# EAGLE board Bee Carrier v1.0 (EAGLE 6.2)
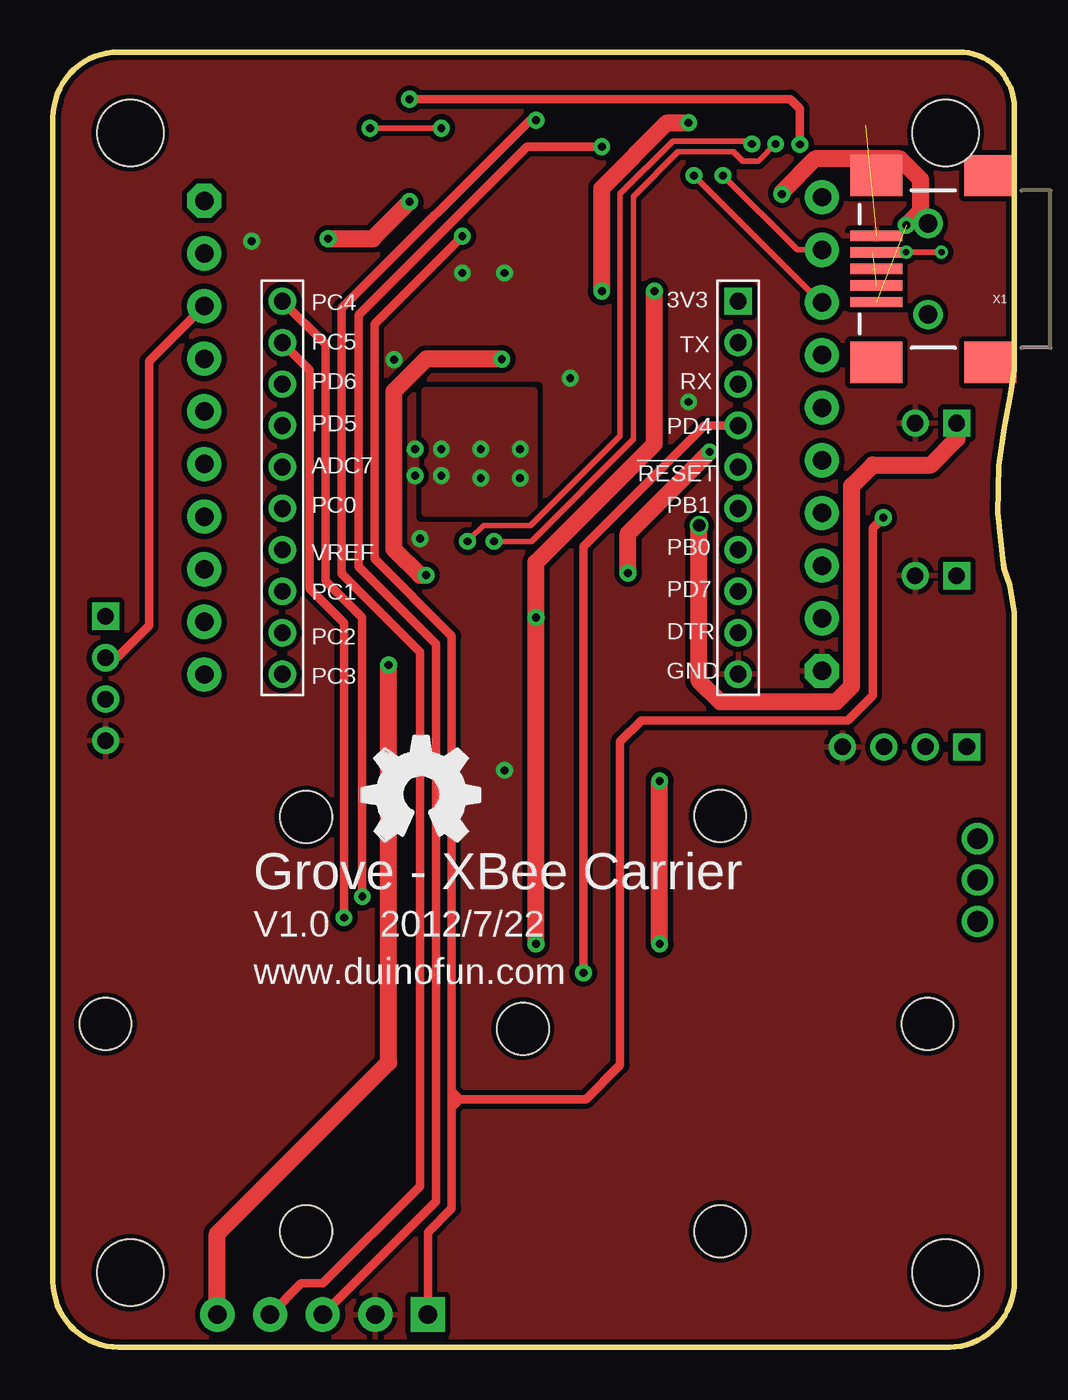
[diagram p0: board, top side]
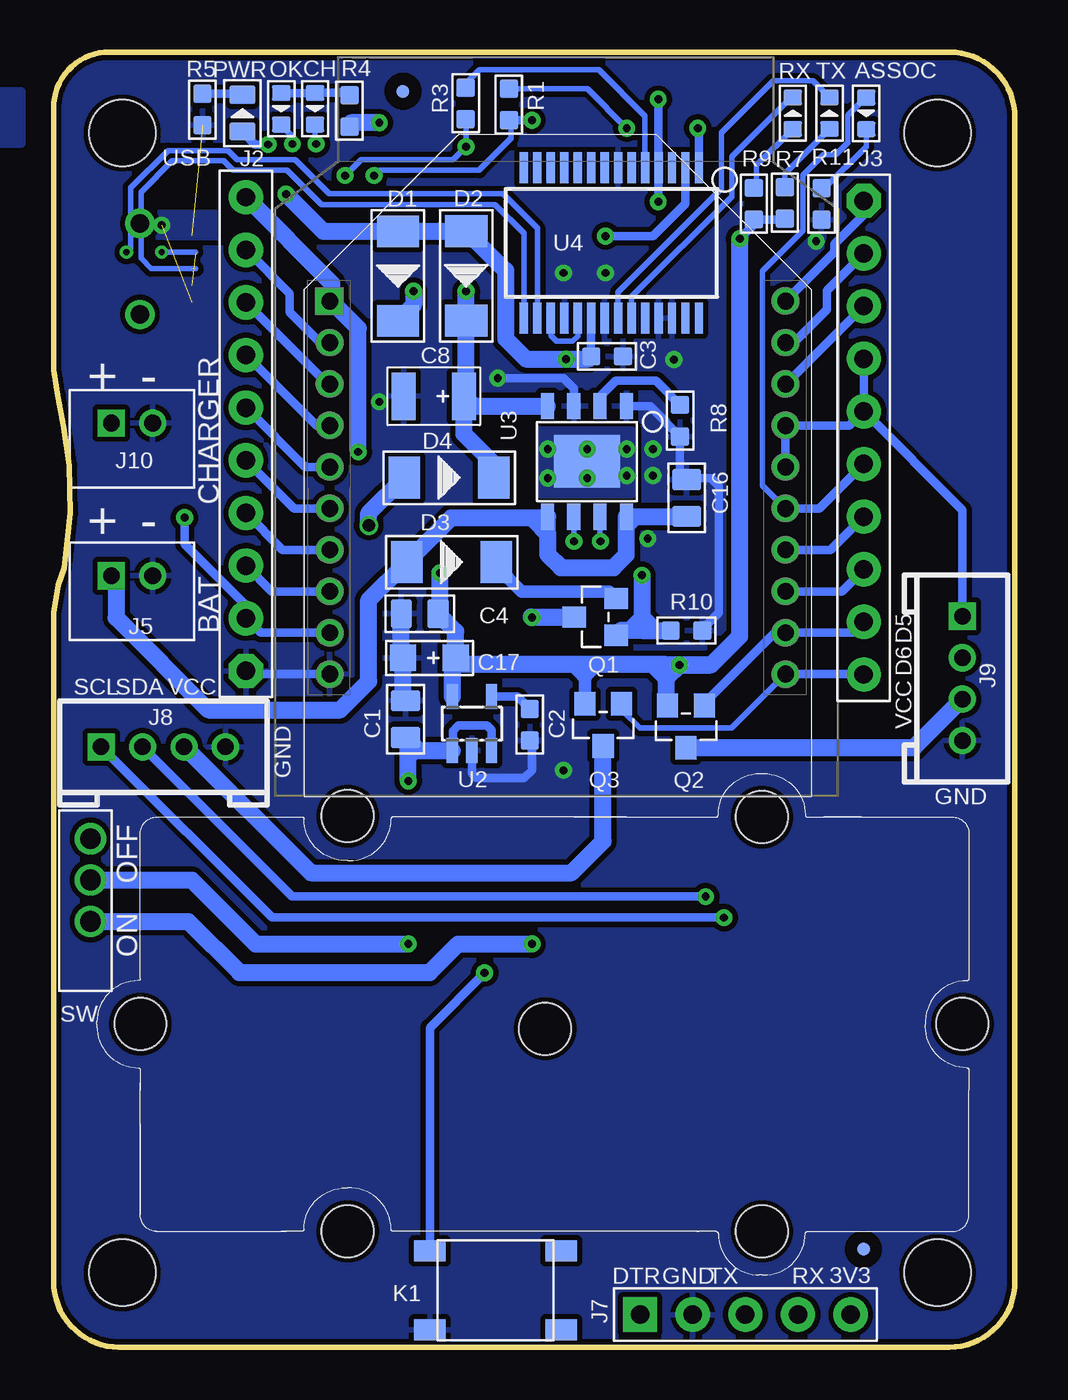
[diagram p1: board, bottom side, seen from below]

Size 46.48 x 62.53 mm. Coordinates in mm from the lower left corner, seen from the top.
Outline: 0,59.46 arc-67 2.69,62.53
Outline: 46.48,3.07 arc-67 43.79,0
Outline: 3.1,0 arc-67 0.03,2.69
Outline: 46.46,47.17 46.38,46.94
Outline: 46,38.05 46.46,35.46 46.46,3.2 arc-90 43.28,0.03 3.23,0.03 arc-90 0.06,3.2 0.06,59.35 arc-90 3.23,62.53 43.75,62.53 arc-90 46.46,59.82 46.46,47.17
Outline: 46.46,35.48 46.23,36.8 45.95,37.62 45.64,40.28 45.7,42.57 45.97,44.4 46.25,45.95 46.46,47.17
Copper layers (1*16): Top 0.035mm / dielectric 1.5mm / Bottom 0.035mm
Design rules: minimum track width 6mil, minimum drill 12mil, track to track 6mil, track to pad 6mil, pad to pad 6mil, via to via 6mil, smd to smd 0mil, copper to edge 10mil, drill to drill 10mil, minimum pad ring 10mil, minimum via ring 6mil, stop-mask expansion 2mil, vias tented up to drill 0mil, thermal gap 10mil
Net classes: 0 default: width 0.203 mm, drill 0.305 mm, clearance 0.127 mm
Holes 3.2 mm at 3.79,58.62 3.79,3.62 43.14,3.62 43.14,58.62
Holes 2.5 mm at 2.59,15.62 32.26,25.65 12.27,25.6 22.73,15.39 32.26,5.61 42.27,15.62 12.27,5.61

## Footprints (pad centres in the part's own frame; a part is rotated, then mirrored left to right if it is on the bottom)
D0603 = smd 0.762 x 0.889: + -0.762,0; - 0.762,0
0805 = smd 1.016 x 1.397: 1 -0.889,0; 2 0.889,0
0603 = smd 0.889 x 0.889: 1 -0.762,0; 2 0.762,0
AVX-B = smd 1.143 x 2.286: + -1.46,0; - 1.46,0
AVX-A = smd 1.27 x 1.27: + -1.27,0; - 1.27,0
D2010 = smd 1.524 x 2.032: + -2.159,0; - 2.159,0
2.54_10P = drill 0.889 pad 1.651 octagon: 1 0,11.43 | drill 0.889 pad 1.651: 2 0,8.89; 3 0,6.35; 4 0,3.81; 5 0,1.27; 6 0,-1.27; 7 0,-3.81; 8 0,-6.35; 9 0,-8.89; 10 0,-11.43
2P-2.0-LEADED-4.7X6.0 = drill 0.8 pad 1.3 square: 1 -1,0.75 | drill 0.8 pad 1.3: 2 1,0.75
CK_1X5 = drill 0.889 pad 1.651 square: 1 0,5.08 | drill 0.889 pad 1.651: 2 0,2.54; 3 0,0; 4 0,-2.54; 5 0,-5.08
2.0_1X4 = drill 0.8 pad 1.27 square: 1 -3,0 | drill 0.8 pad 1.27: 2 -1,0; 3 1,0; 4 3,0
BTN-S = smd 1.524 x 1.016: 0A -3.175,1.905; 0B 3.175,1.905; 1A -3.175,-1.905; 1B 3.175,-1.905
MARK = smd 0.635 x 0.635: P$1 0,0
D0805 = smd 0.889 x 1.27: + -0.889,0; - 0.889,0
SOT23 = smd 1.016 x 1.143: 1 -0.889,-1.016; 2 0.889,-1.016; 3 0,1.016
008-SW-3P-DIP = drill 1 pad 1.5: P$1 -3,0.24; P$2 -1,0.24; P$3 1,0.24
CCBEE-PRO = drill 0.813 square: 1 -11,9 | drill 0.813: 2 -11,7; 3 -11,5; 4 -11,3; 5 -11,1; 6 -11,-1; 7 -11,-3; 8 -11,-5; 9 -11,-7; 10 -11,-9; 11 11,-9; 12 11,-7; 13 11,-5; 14 11,-3; 15 11,-1; 16 11,1; 17 11,3; 18 11,5; 19 11,7; 20 11,9
SOT23-5 = smd 0.55 x 1.2: 1 -0.95,-1.3; 2 0,-1.3; 3 0.95,-1.3; 4 0.95,1.3; 5 -0.95,1.3
SOP8 = smd 0.635 x 1.27: 1 -1.905,-2.667; 2 -0.635,-2.667; 3 0.635,-2.667; 4 1.905,-2.667; 5 1.905,2.667; 6 0.635,2.667; 7 -0.635,2.667; 8 -1.905,2.667 | smd 3.175 x 2.54: HEAT 0,0
SSOP28 = smd 0.4 x 1.5: 1 -4.225,-3.625; 2 -3.575,-3.625; 3 -2.925,-3.625; 4 -2.275,-3.625; 5 -1.625,-3.625; 6 -0.975,-3.625; 7 -0.325,-3.625; 8 0.325,-3.625; 9 0.975,-3.625; 10 1.625,-3.625; 11 2.275,-3.625; 12 2.925,-3.625; 13 3.575,-3.625; 14 4.225,-3.625; 15 4.225,3.625; 16 3.575,3.625; 17 2.925,3.625; 18 2.275,3.625; 19 1.625,3.625; 20 0.975,3.625; 21 0.325,3.625; 22 -0.325,3.625; 23 -0.975,3.625; 24 -1.625,3.625; 25 -2.275,3.625; 26 -2.925,3.625; 27 -3.575,3.625; 28 -4.225,3.625
USB-MINIB-NOSTOP = smd 2.5 x 0.5: D+ 2.5,0; D- 2.5,0.8; GND 2.5,-1.6; ID 2.5,-0.8; VBUS 2.5,1.6 | smd 2.5 x 2: G1 -3,-4.5; G2 -3,4.5; G3 2.5,4.5; G4 2.5,-4.5 | drill 0.9 pad 0.8: H1 0,2.2 | drill 0.9 pad 0.787: H2 0,-2.2

## Placement (x,y rotation side)
ASSOC  Green  [D0603]  7.24,59.56 270 bottom
C1  10uF  [0805]  29.47,30.33 90 bottom
C2  100nF  [0603]  23.47,30.07 270 bottom
C3  100nF  [0603]  19.74,47.84 180 bottom
C4  10uF  [0805]  28.79,35.42 180 bottom
C8  10V-22uF  [AVX-B]  28.11,45.91 180 bottom
C16  1uF  [0805]  15.9,41 90 bottom
C17  15v-10uF  [AVX-A]  28.32,33.29 180 bottom
CH  RED  [D0603]  33.84,59.79 270 bottom
D1  SS14  [D2010]  29.83,51.72 270 bottom
D2  SS14  [D2010]  26.54,51.72 270 bottom
D3  SS14  [D2010]  27.24,37.91 0 bottom
D4  SS14  [D2010]  27.37,41.98 0 bottom
J2  HEADER-10P_STANDARD  [2.54_10P]  37.17,44.09 180 bottom
J3  HEADER-10P_STANDARD  [2.54_10P]  7.36,43.91 0 bottom
J5  [2P-2.0-LEADED-4.7X6.0]  42.67,36.5 0 bottom
J7  HEADER_1X5_DD  [CK_1X5]  13.07,1.6 90 bottom
J8  TWIG-2.0-DIP  [2.0_1X4]  41.16,29 0 bottom
J9  TWIG-2.0-DIP  [2.0_1X4]  2.6,32.29 270 bottom
J10  [2P-2.0-LEADED-4.7X6.0]  42.67,43.87 0 bottom
K1  BOTTON-4P-DD  [BTN-S]  25.12,2.77 0 bottom
LOGO2  OSHW_LOGO_FILLX0200-NT  [OSHW_FILLX200_NOTEXT]  14.99,24.43 0 top
MARK1  PAD-MARK  [MARK]  7.37,4.75 0 bottom
MARK2  PAD-MARK  [MARK]  29.59,60.63 0 bottom
OK  Green  [D0603]  35.47,59.78 270 bottom
PWR  red  [D0805]  37.34,59.58 90 bottom
Q1  Si2305DS  [SOT23]  20.32,35.27 90 bottom
Q2  Si2305DS  [SOT23]  15.93,29.97 180 bottom
Q3  Si2305DS  [SOT23]  19.93,30.05 180 bottom
R1  1K  [0603]  24.48,59.99 270 bottom
R3  1K  [0603]  26.57,60.05 270 bottom
R4  1k  [0603]  32.18,59.68 270 bottom
R5  1K  [0603]  39.27,59.75 90 bottom
R7  1K  [0603]  11.16,55.24 270 bottom
R8  3.9K  [0603]  16.22,44.73 90 bottom
R9  1K  [0603]  12.66,55.21 270 bottom
R10  10K  [0603]  15.91,34.61 180 bottom
R11  1K  [0603]  9.39,55.19 90 bottom
RX  red  [D0603]  10.78,59.57 90 bottom
SW  [008-SW-3P-DIP]  44.92,21.57 270 bottom
TWIG1  U2N  [U2N_SILK]  22.1,15.39 0 bottom
TX  red  [D0603]  9.01,59.57 90 bottom
U1  OPEN_BEE_DIP  [CCBEE-PRO]  22.13,41.5 0 bottom
U2  RT9167A_33PB  [SOT23-5]  26.27,30.12 0 bottom
U3  CN3083  [SOP8]  20.71,42.77 180 bottom
U4  FT232RL  [SSOP28]  19.53,53.31 180 bottom
U$1  WIFI_SILK  [WIFI_SILK]  22,41.17 0 bottom
X1  USB-SMD-NS  [USB-MINIB-NOSTOP]  42.29,52.06 180 top

## Library data of the parts
ASSOC C1-C4 C8 C16 C17 CH D1-D4 K1 MARK1 MARK2 OK PWR Q1-Q3 R1 R3-R5 R7-R11 RX SW TX = Discrete
J2 J3 J5 J8-J10 = Connector
J7 = CONNECTER
LOGO2 = logo
TWIG1 = twig_template1
U1 = EXT_moudle
U2-U4 = IC
U$1 = seeedleo
X1 = SparkFun-Connectors

## Nets
A1: J3.8 U1.13
AREF: J3.7 U1.14
ASSOC: ASSOC.+ J3.6 U1.15
D4: J2.7 K1.0A U1.4
D5: J3.4 J3.5 J9.1 U1.16 U1.17
D6: J3.3 J9.2 U1.18
D7: J2.3 U1.8
D8: J2.4 U1.7
D9: J2.5 U1.6
D+: U4.15 X1.D+
D-: U4.16 X1.D-
DTR: J2.2 J7.1 U1.9 U4.2
GND: C1.2 C2.2 C3.1 C4.2 C8.- C16.2 C17.- J2.1 J5.2 J7.2 J8.4 J9.4 J10.2 K1.1A R5.1 R8.1 R10.1 R11.1 U1.10 U2.2 U3.1 U3.3 U4.7 U4.18 U4.21 U4.25 U4.26 X1.GND
HEAT: U3.HEAT
N$1: PWR.- R5.2
N$2: R8.2 U3.2
N$3: D4.+ J10.1
N$6: C2.1 U2.4
N$7: CH.- U3.7
N$8: OK.- U3.6
N$9: CH.+ OK.+ R4.1
N$10: U4.17 U4.19
N$11: D3.- Q1.2
N$12: ASSOC.- R11.2
N$13: D1.- Q1.3 SW.P$3
N$15: R9.1 RX.+
N$16: R7.1 TX.+
PWR_CTR1: J3.10 Q3.1 U1.11
PWR_CTR2: J3.9 Q2.1 U1.12
RESET: J2.6 U1.5
RX: J2.8 J7.4 R1.2 U1.3
RX_LED: RX.- U4.23
RXD: R3.1 U4.5
SCL: J3.2 J8.1 U1.19
SDA: J3.1 J8.2 U1.20
TX: J2.9 J7.3 R3.2 U1.2
TX_LED: TX.- U4.22
TXD: R1.1 U4.1
USB_5V: C3.2 D1.+ D2.+ Q1.1 R10.2 U4.20 X1.VBUS
VBET: C16.1 D3.+ J5.1 U3.5 U3.8
VBET_OUT: C1.1 SW.P$2 U2.1 U2.3
VCC_3V3: C4.1 C17.+ J2.10 J7.5 PWR.+ Q2.2 Q3.2 R7.2 R9.2 U1.1 U2.5 U4.4
VCC_OUT1: J8.3 Q3.3
VCC_OUT2: J9.3 Q2.3
VIN: C8.+ D2.- D4.- R4.2 U3.4

## Tracks (layer width: path | path; a pad name or v marks a point on that pad's centre or on a via)
A1
  Bottom 0.406: U1.13 8.42,36.5 J3.8
AREF
  Bottom 0.406: U1.14 8.96,38.5 J3.7
ASSOC
  Bottom 0.254: ASSOC.+ 7.29,60.32 8.13,59.49 8.13,58.15 8.7,57.58 9.29,57.58 10.29,56.59 10.29,53.9 12.24,51.95 12.24,41.61 U1.15
  Bottom 0.406: U1.15 9.5,40.5 J3.6
D4  (via drill 0.38 pad 0.81)
  Top 0.406: v25.65,18.08 25.65,38.66 31.5,44.5 U1.4
  Bottom 0.406: U1.4 33.77,44.5 J2.7 | K1.0A 28.3,15.44 v25.65,18.08
D5
  Bottom 0.406: J9.1 2.6,40.42 J3.5 | U1.16 U1.17 8.04,44.5 J3.5 | J3.5 J3.4
D6
  Top 0.406: J9.2 3.15,33.29 4.7,34.85 4.7,47.61 J3.3
  Bottom 0.406: U1.18 J3.3
D7
  Bottom 0.406: U1.8 35.93,36.5 J2.3
D8
  Bottom 0.406: U1.7 35.39,38.5 J2.4
D9
  Bottom 0.406: U1.6 34.85,40.5 J2.5
D+  (1 unrouted)
  Bottom 0.254: U4.15 23.76,53.78 25.15,55.17 33.53,55.17 35.18,56.82 37.79,56.82 38.24,57.27 40.74,57.27 42.24,55.77 42.24,52.57 41.74,52.07 39.59,52.07
D-  (via drill 0.3 pad 0.64)  (1 unrouted)
  Top 0.254: v42.94,52.87 v41.24,52.87
  Bottom 0.254: U4.16 23.11,54.02 24.76,55.68 33.15,55.68 34.8,57.33 37.59,57.33 38.04,57.77 40.94,57.77 42.74,55.97 42.74,53.07 v42.94,52.87 | v41.24,52.87 39.6,52.87
DTR  (via drill 0.38 pad 0.81)
  Top 0.406: 19.3,11.61 19.3,11.99 | 19.3,11.99 19.3,12.37 | 19.3,12.37 19.3,34.34 15.57,38.07 15.57,49.4 v19.81,53.64 | 19.3,11.99 19.68,11.99 | 19.68,11.99 25.78,11.99 27.43,13.64 27.43,29.26 28.45,30.28 38.43,30.28 39.62,31.47 39.62,39.55 v40.13,40.06 | 19.68,11.99 19.3,12.37 | 19.3,11.61 19.68,11.99 | 19.3,11.61 19.3,6.73 18.15,5.58 J7.1
  Bottom 0.406: U1.9 36.47,34.5 J2.2 37.17,35.82 40.13,38.79 v40.13,40.06 | v19.81,53.64 17.53,53.64 15.96,55.21 U4.2
GND  (via drill 0.38 pad 0.81)  (1 unrouted)
  Bottom 0.406: U1.10 37.01,32.5 J2.1 | U2.2 26.27,27.72 26.04,27.48 23.75,27.48 23.37,27.86 23.37,29.2 C2.2 | R10.1 15.14,34.69 14.35,35.48 14.35,41.58 14.73,41.96 15.83,41.96 C16.2 16.22,42.21 R8.1 17.68,45.43 U3.1 | U3.3 21.35,46.29 21.84,46.79 v25.02,46.79
  Bottom 0.813: C4.2 29.68,33.37 C17.- 29.59,31.34 C1.2
  other vias: 30.73,45.64 16.51,47.68 19.81,51.87 17.78,39.04 21.84,27.86 21.84,51.87 17.53,42.09 17.53,43.36 9.65,53.39
  pour Bottom: 49.91,60.63 48.01,60.63 48.01,58.09 49.91,58.09
  pour Bottom (isolate 0.254, rank 2): 46.74,62.66 -0.13,62.66 -0.13,-0.46 46.74,-0.46
  pour Top (isolate 0.254, rank 2): 46.74,62.66 -0.13,62.66 -0.13,-0.46 46.74,-0.46
HEAT  (via drill 0.38 pad 0.81)
  other vias: 22.61,43.36 22.61,41.96 20.7,43.36 18.8,43.36 18.8,42.09 20.7,41.96
  pour Bottom (isolate 0.254, no thermals): 22.99,44.25 18.54,44.25 18.54,41.2 22.99,41.2
  pour Top (isolate 0.254): 23.24,46.15 18.03,46.15 18.03,40.31 23.24,40.31
N$1
  Bottom 0.406: R5.2 37.39,60.51 PWR.-
N$2
  Bottom 0.406: U3.2 20.08,45.88 19.3,46.66 17.38,46.66 R8.2
N$3  (via drill 0.6)
  Top 0.813: v31.24,39.67 31.24,32.18 32.26,31.17 37.85,31.17 38.61,31.93 38.61,41.58 39.62,42.6 42.42,42.6 43.69,43.87 43.69,44.6 J10.1
  Bottom 0.813: v31.24,39.67 31.24,40.27 D4.+
N$6
  Bottom 0.406: U2.4 24.06,31.42 C2.1
N$7  (via drill 0.38 pad 0.81)
  Top 0.254: v20.07,38.91 20.07,39.04 20.19,39.04 20.83,39.67 23.11,39.67 27.43,43.99 27.43,55.68 29.97,58.22 33.66,58.22 v33.78,58.09
  Bottom 0.254: U3.7 20.08,38.93 v20.07,38.91 | CH.- 33.84,58.15 v33.78,58.09
N$8  (via drill 0.38 pad 0.81)
  Top 0.254: v21.34,38.91 23.14,38.91 28.07,43.84 28.07,55.55 30.23,57.71 32.89,57.71 33.35,57.25 34.09,57.25 v34.93,58.09
  Bottom 0.254: U3.6 21.35,38.93 v21.34,38.91 | OK.- 35.47,59 34.94,58.47 v34.94,58.09 v34.93,58.09
N$9
  Bottom 0.406: OK.+ CH.+ 32.28,60.55 R4.1
N$10
  Bottom 0.254: U4.19 21.16,48.82 21.42,48.56 22.19,48.56 22.46,48.83 U4.17
N$11
  Bottom 0.61: D3.- 25.09,37.71 23.88,36.5 19.64,36.5 Q1.2
N$12
  Bottom 0.254: R11.2 9.25,55.96 7.24,57.96 ASSOC.-
N$13  (via drill 0.38 pad 0.81)
  Top 0.813: v23.37,19.48 v23.37,35.23 23.37,37.9 29.08,43.61 v29.08,50.98
  Bottom 0.813: Q1.3 23.41,35.27 v23.37,35.23 | D1.- 29.08,50.31 v29.08,50.98 | SW.P$3 39.95,20.57 37.49,18.11 28.3,18.11 26.92,19.48 v23.37,19.48
N$15
  Bottom 0.254: RX.+ 12.53,57.05 12.53,56.1 R9.1
N$16
  Bottom 0.254: R7.1 11.16,56.66 TX.+
PWR_CTR1
  Bottom 0.254: Q3.1 19.04,30.77 18.16,29.9 13.73,29.9 U1.11
  Bottom 0.406: U1.11 7.37,32.5 J3.10
PWR_CTR2
  Bottom 0.406: J3.9 7.88,34.5 U1.12 11.16,34.47 11.68,34.47 15.04,31.11 Q2.1
RESET
  Bottom 0.406: U1.5 34.31,42.5 J2.6
RX  (via drill 0.38 pad 0.81)
  Top 0.254: J2.8 37.11,50.44 v30.99,56.57
  Top 0.406: v23.37,59.23 23.07,59.23 14,50.16 14,37.36 17.78,33.58 17.78,7.8 13.08,3.1 12.04,3.1 J7.4
  Bottom 0.254: v30.99,56.57 30.73,56.82 25.92,56.82 24.38,58.35 24.38,59.13 R1.2
  Bottom 0.406: U1.3 33.23,46.5 J2.8 | v23.37,59.23 R1.2
RX_LED
  Bottom 0.254: RX.- 10.83,60.38 13.72,57.48 13.72,55.55 18.56,50.71 U4.23
RXD
  Bottom 0.254: R3.1 26.57,60.99 25.89,61.66 20.14,61.66 17.91,59.43 U4.5
SCL  (via drill 0.38 pad 0.81)
  Top 0.406: v14.1,20.75 14.1,34.98 12.45,36.63 12.45,47.18 U1.19
  Bottom 0.406: U1.19 10.73,48.5 9.14,50.09 9.14,51.02 J3.2 | J8.1 35.92,20.75 v14.1,20.75
SDA  (via drill 0.38 pad 0.81)
  Top 0.406: v14.99,21.77 14.99,35.23 13.21,37.01 13.21,48.42 U1.20
  Bottom 0.406: J8.2 34.93,21.77 v14.99,21.77 | J3.1 7.36,54.67 8.76,53.26 8.76,52.86 U1.20
TX  (via drill 0.38 pad 0.81)
  Top 0.254: J2.9 35.97,52.98 v32.39,56.57
  Top 0.406: v26.54,57.96 22.93,57.96 14.8,49.83 14.8,37.7 18.54,33.96 18.54,7.07 J7.3
  Bottom 0.254: v32.39,56.57 31.62,57.33 27.18,57.33 v26.54,57.96 26.54,59.26 R3.2
  Bottom 0.406: U1.2 33.59,48.5 35.05,49.96 35.05,50.86 J2.9
TX_LED
  Bottom 0.254: TX.- 9.81,61.14 11.71,61.14 14.22,58.62 14.22,55.93 19.21,50.95 U4.22
TXD  (via drill 0.38 pad 0.81)
  Top 0.254: v18.8,58.85 v15.37,58.85
  Bottom 0.254: R1.1 20.7,60.75 v18.8,58.85
  Bottom 0.406: U4.1 15.31,58.79 v15.37,58.85
USB_5V  (via drill 0.38 pad 0.81)  (1 unrouted)
  Top 0.813: v18.06,37.28 17.76,37.28 16.5,38.54 16.5,46.14 18.07,47.71 v21.72,47.71 | v35.24,55.67 35.24,55.77 36.84,57.37 40.94,57.37 41.94,56.37 41.94,54.87 v41.24,54.17
  Bottom 0.406: U4.20 C3.2
  Bottom 0.813: 18.03,34.61 19.07,34.61 Q1.1 | 18.03,34.61 R10.2 | 18.03,34.61 18.06,34.64 18.06,35.2 | v18.06,37.28 18.06,35.2 | 18.06,35.2 18.54,34.72 17.53,34.72 17.91,35.1 | C3.2 20.63,47.71 v21.72,47.71 23.66,47.71 24.64,48.69 24.64,51.98 D2.+ D1.+ 33.44,53.88 v35.24,55.67
  pour Bottom (isolate 0.254, no thermals): 41.74,53.57 38.54,53.57 38.54,54.77 41.74,54.77
VBET
  Bottom 0.813: 22.61,39.29 22.61,40.09 U3.5 22.66,40.06 23.24,40.06 | 22.61,39.29 22.61,38.28 21.97,37.64 19.43,37.64 18.81,38.26 U3.8 18.37,40.1 | D3.+ 29.65,38.15 | D3.+ 31.24,36.07 31.24,32.16 32.62,30.78 38.99,30.78 43.43,35.23 43.43,37.01 J5.1 | D3.+ 27.26,40.06 23.24,40.06 | C16.1 15.92,40.1 18.37,40.1 | 23.24,40.06 23.24,39.93 22.61,39.29 | 18.37,40.1 18.8,39.67
VBET_OUT  (via drill 0.38 pad 0.81)
  Top 0.813: v29.34,19.48 v29.34,27.36
  Bottom 0.406: U2.3 25.32,29.82 25.53,30.02 26.92,30.02 27.18,29.77 27.18,28.86 U2.1
  Bottom 0.813: U2.1 28.84,28.82 C1.1 29.34,29.31 29.34,28.5 | SW.P$2 39.79,22.57 36.7,19.48 v29.34,19.48 | v29.34,27.36 29.34,28.5 | 29.34,28.5 28.96,28.88
VCC_3V3  (via drill 0.38 pad 0.81)
  Top 0.406: v36.11,58.06 36.11,59.78 35.64,60.25 v17.27,60.25
  Top 0.813: v31.75,43.23 27.81,39.29 v27.81,37.39 | J7.5 7.99,5.5 16.26,13.77 v16.26,32.94 | v13.34,53.52 15.49,53.52 v17.27,55.3
  Bottom 0.406: v13.34,53.52 12.53,54.32 R9.2 11.21,54.45 | 11.21,54.45 11.18,54.41 | 11.2,54.45 11.07,54.45 | 11.21,54.45 11.2,54.45 | 11.2,54.45 R7.2 | v17.27,55.3 17.26,55.31 U4.4 17.26,60.23 v17.27,60.25 | v36.11,58.06 36.72,58.06 PWR.+
  Bottom 0.61: 20.82,32.41 20.82,32.83 20.95,32.97 | 20.82,32.41 Q3.2 | 20.82,32.41 20.93,32.41 21.34,32.82 | 20.82,32.41 20.73,32.41 20.32,32.82
  Bottom 0.813: 27.22,32.97 U2.5 | 27.22,32.97 27.22,33.11 C17.+ 27.05,34.57 C4.1 27.81,35.5 v27.81,37.39 | 27.22,32.97 20.95,32.97 16.89,32.97 | Q2.2 16.89,31.06 16.89,32.31 | 14.71,32.97 14.73,32.94 v16.26,32.94 16.89,32.31 | v13.34,53.52 13.34,34.34 14.71,32.97 | v31.75,43.23 31.75,49.2 33.05,50.5 U1.1 33.02,50.61 33.02,51.36 J2.10 | 16.89,32.97 14.71,32.97 | 16.89,32.31 16.89,32.97 | 16.89,32.31 17.53,32.94
VCC_OUT1
  Bottom 0.813: J8.3 40.12,29 34.04,22.91 21.46,22.91 19.94,24.43 19.94,29.03 Q3.3
VCC_OUT2
  Bottom 0.813: J9.3 4.94,28.96 Q2.3
VIN  (via drill 0.38 pad 0.81)
  Top 0.813: v26.54,50.98 26.54,55.95 29.7,59.11 v30.73,59.11
  Bottom 0.813: D4.- 25.27,42.05 25.27,42.72 26.65,44.1 C8.+ | D2.- v26.54,50.98 | D2.- | D2.- 26.54,46.02 C8.+ | U3.4 26.17,45.43 C8.+ | v30.73,59.11 32.11,59.11 32.18,59.03 R4.2

## Text on the board
tPlace: 3V3 | PC4 | PC5 | TX | PD6 | RX | PD5 | PD4 | ADC7 | RESET | PC0 | PB1 | PB0 | VREF | PD7 | PC1 | DTR | PC2 | GND | PC3 | Grove - XBee Carrier | V1.0 | 2012/7/22 | www.duinofun.com
bPlace: USB | - | + | CHARGER | - | + | BAT | D5 | D6 | VCC | SDA | SCL | VCC | GND | GND | OFF | ON | 3V3 | RX | TX | GND | DTR